# Altium PCB I2C_Shield.PcbDoc
Units mil, origin at the board's own origin, x right, y up, seen from the top; angles counter-clockwise.
Board outline 2102.56 x 2245.28 mil, 2 copper layers (Top Layer, Bottom Layer); 38 components, 43 nets, 144 pads, 21 vias.
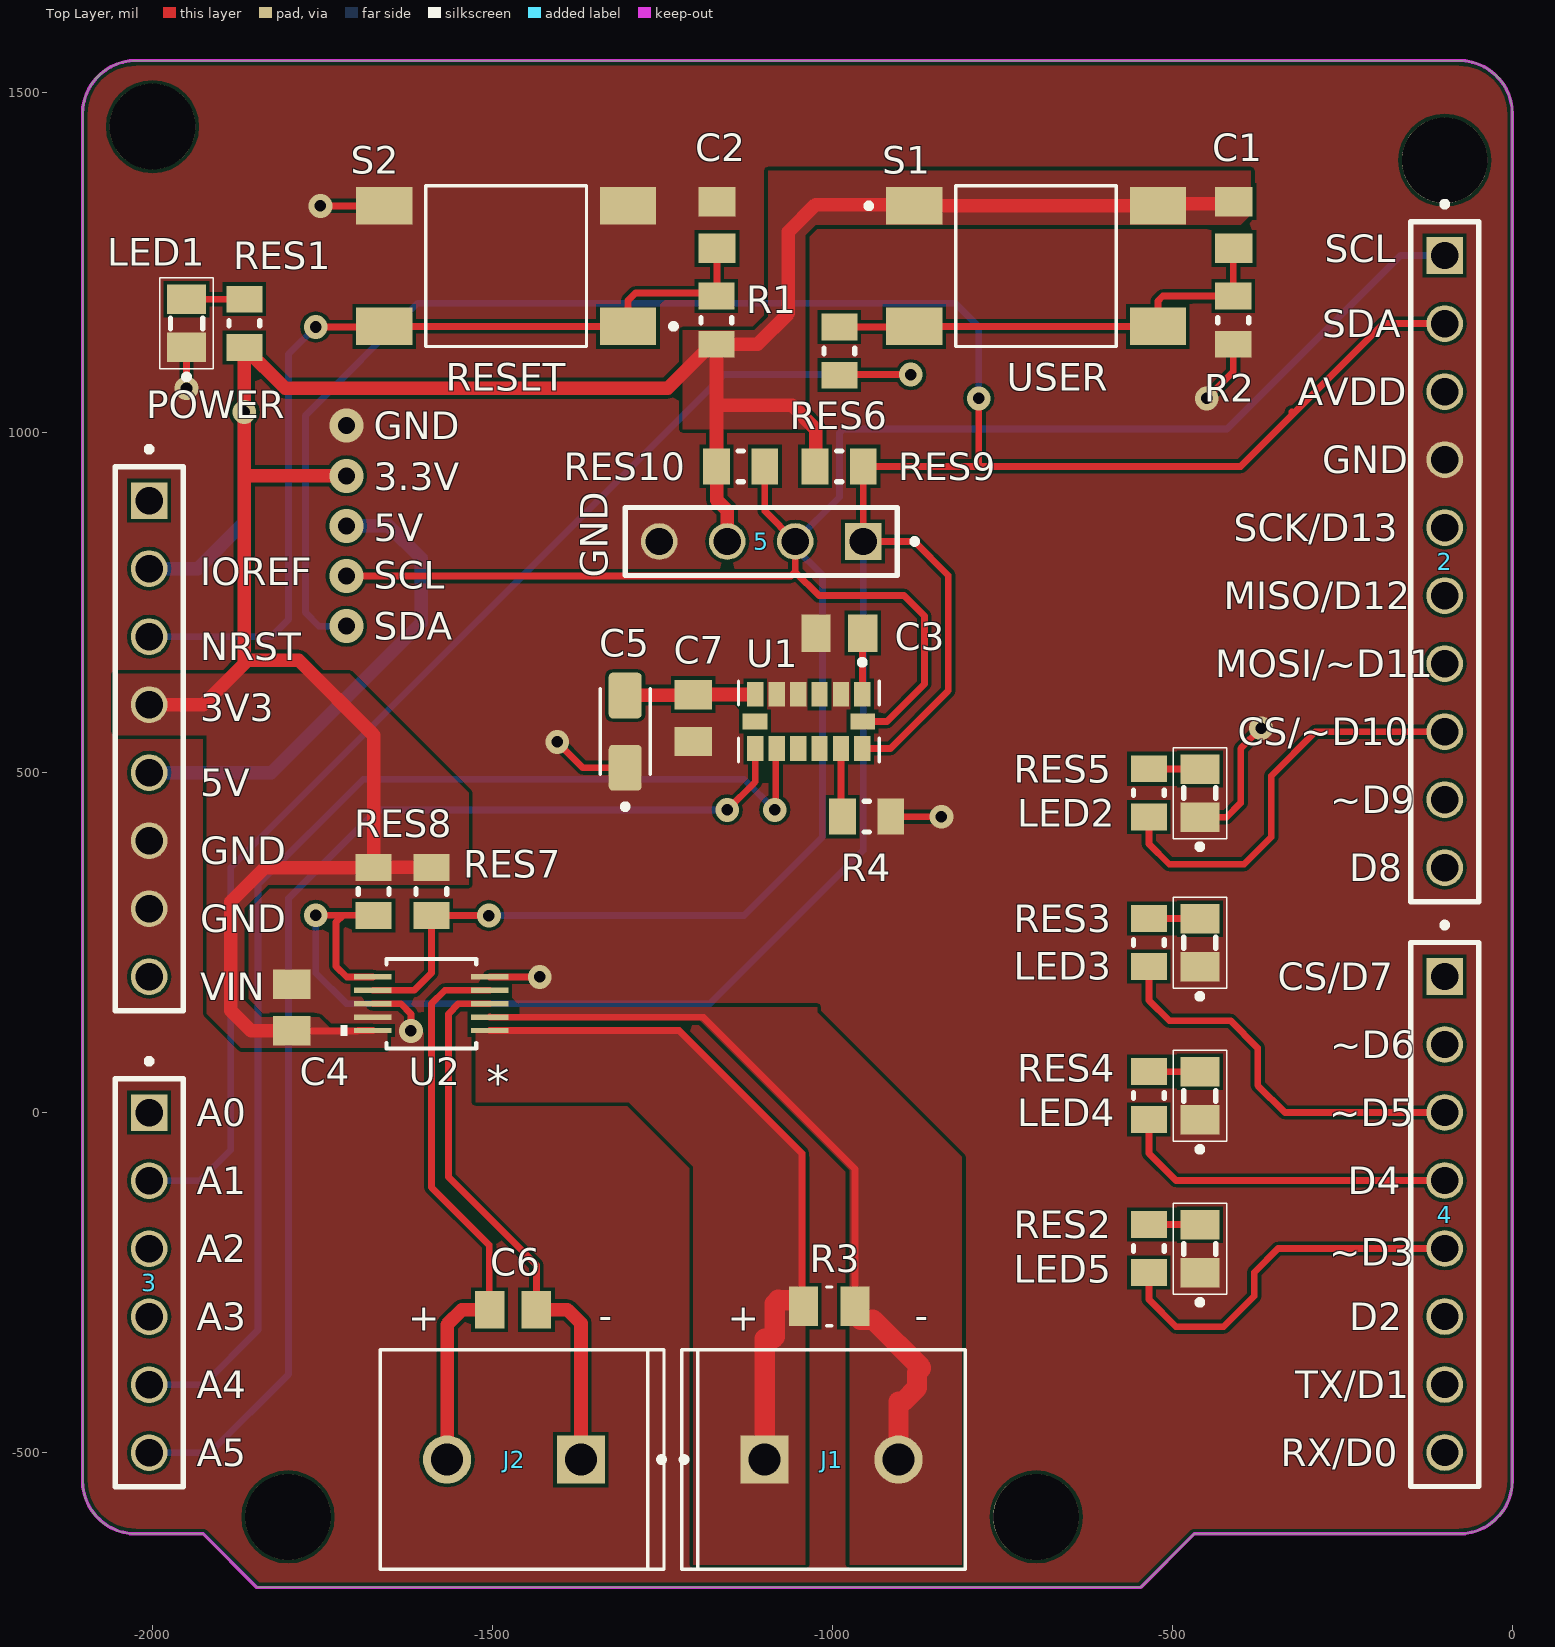
[diagram p0: Top Layer view]
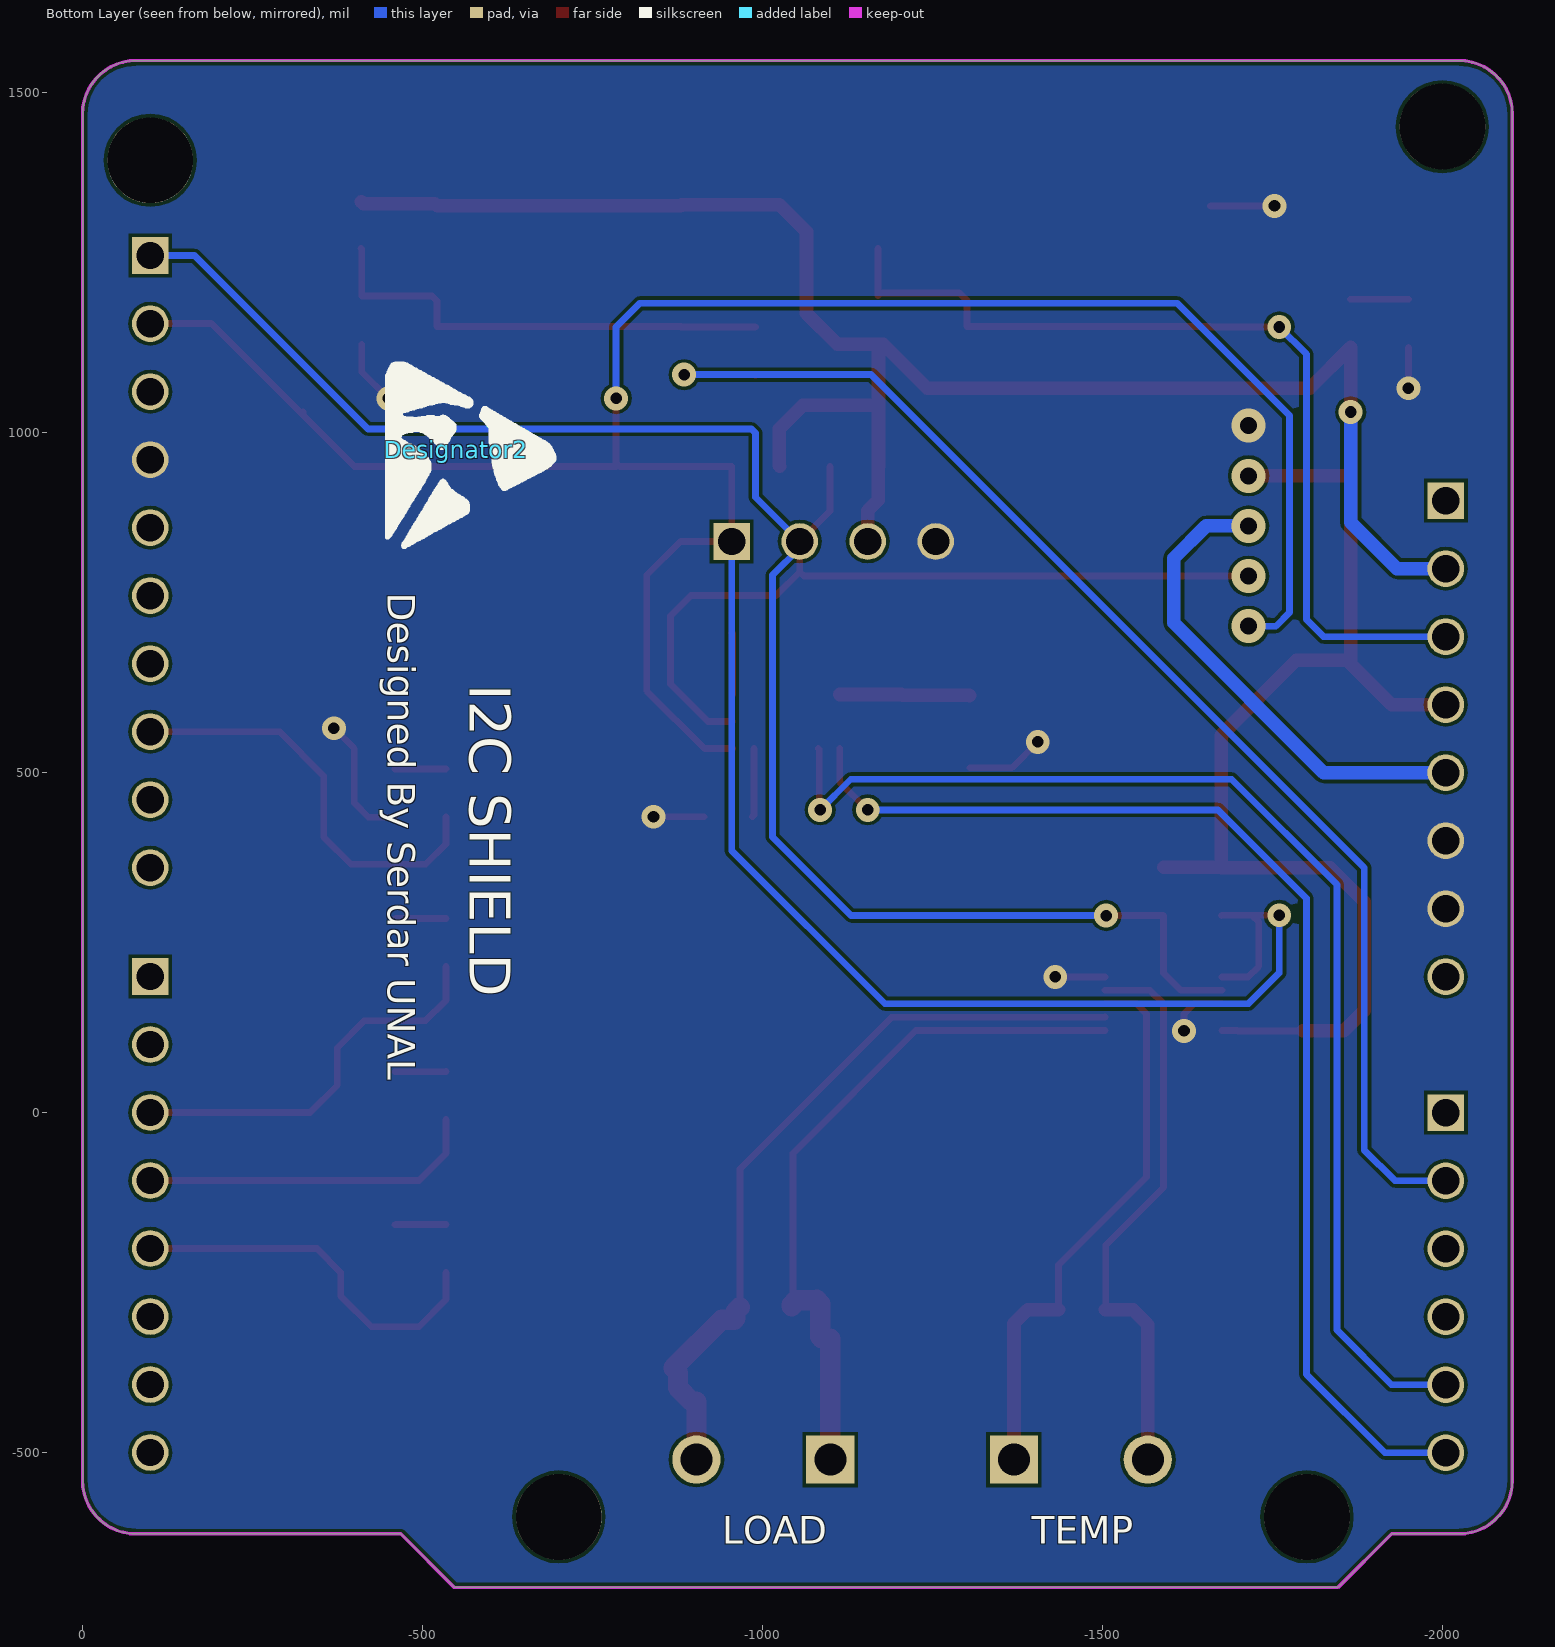
[diagram p1: Bottom Layer view, seen from below]

## Layer stack, top to bottom
Top Solder: solder mask 0.4, Solder Resist, Dk 3.5
Top Layer: signal copper 1.4
Dielectric 1: dielectric 12.6, FR-4, Dk 4.8
Bottom Layer: signal copper 1.4
Bottom Solder: solder mask 0.4, Solder Resist, Dk 3.5

## Board outline
-2102.95,-540.94 ccw(c-2024.21,-540.94) -2024.21,-619.69 -1925.2,-619.69 -1846.46,-698.43 -547.24,-698.43 -468.5,-619.69 -79.13,-619.68 ccw(c-79.13,-540.94) -0.39,-540.94 -0.39,1468.11 ccw(c-79.13,1468.11) -79.13,1546.85 -2024.21,1546.85 ccw(c-2024.21,1468.11) -2102.95,1468.11

## Design rules (kind name [scope] priority, off if disabled: settings)
Clearance [All] p1: gap=5 ignorepadtopadclearanceinfootprint=FALSE
ComponentClearance [All] p1: gap=10 collisioncheckmode=3 verticalgap=-100 showdistances=FALSE
HoleSize [All] p1: absolutevalues=TRUE maxlimit=200 minlimit=5.91 maxpercent=80.000 minpercent=20.000
HoleToHoleClearance [All] p1: gap=20 allowstackedmicrovias=TRUE
MinimumSolderMaskSliver [All] p1: minsoldermaskwidth=3.11
NetAntennae [All] p1: netantennaetolerance=10
PlaneConnect [All] p1: planeconnectstyle=Direct reliefexpansion=20 reliefentries=4 reliefconductorwidth=10 reliefairgap=10
PolygonConnect [All] p1: connectstyle=Direct reliefconductorwidth=10 reliefentries=4 polygonreliefangle="90 Angle" airgapwidth=10
RoutingVias [All] p1: holewidth=17 width=35 viastyle="Through Hole" minholewidth=15 minwidth=30 maxholewidth=25 maxwidth=50
SilkToSilkClearance [All] p1: silktosilkclearance=6
SilkToSolderMaskClearance [IsPad] p1: minsilkscreentomaskgap=1.97 clearancetoexposedcopper=TRUE
SolderMaskExpansion [All] p1: expansion=4 istentingtop=FALSE
SupplyNets "Schematic Supply Nets_4" [InNet('AVDD')] p1: voltage=0.000
SupplyNets "Schematic Supply Nets_3" [InNet('VIN')] p2: voltage=0.000
SupplyNets "Schematic Supply Nets_2" [InNet('+3V3')] p3: voltage=0.000
SupplyNets "Schematic Supply Nets_1" [InNet('GND')] p4: voltage=0.000
SupplyNets "Schematic Supply Nets" [InNet('+5V')] p5: voltage=0.000
Width [All] p1: maxlimit=30 minlimit=10 preferedwidth=20 minimp=50.000000 maximp=50.000000 favimp=50.000000
22 further rules are at their usual default settings.

## Components (designator, comment, footprint, x,y, rotation, side; value= is the part's Value field where it differs from the comment)
1 "8x1_Header_2.54" 8X1_HEADER -1995,529.68 r270 top
2 "10X1_Header_2.54" 10X1_HEADER -105,810 r270 top
3 "6x1_Header_2.54" 6X1_HEADER -2005,-250.32 r90 top locked
4 "8x1_Header_2.54" 8X1_HEADER -90,-170 r270 top locked
5 "4x1_Header_2.54" 4X1_HEADER -1125,819.68 r180 top
C1 "CAP_0805_100nF*" CAP_0805 -410,1305 r270 top
C2 "CAP_0805_100nF*" CAP_0805 -1170,1305 r90 top
C3 "CAP_0805_0.1uF" CAP_0805 -990,705 r0 top
C4 "CAP_0805_0.1uF" CAP_0805 -1795,154.45 r90 top
C5 "T491A106K010AT2478" CAPMP3216X180N -1305,560 r90 top
C6 "CAP_0805_470pF" CAP_0805 -1470,-290 r180 top
C7 "CAP_0805_0.1uF" CAP_0805 -1205,580 r270 top
Designator2 "Comment" "LOGO ESD" -550,975 r270 bottom
J1 "282836-2" TE_282836-2 -1001.57,-510.32 r0 top
J2 "282836-2" TE_282836-2 -1468.43,-510.32 r180 top
LED1 "LED_0805_Red" LED_0805 -1950,1160.87 r90 top (schematic designator Red_LED_2)
LED2 "LED_0805_Orange" LED_0805 -460,470 r90 top (schematic designator Orange_LED1)
LED3 "LED_0805_Blue" LED_0805 -460,250 r90 top (schematic designator Blue_LED_1)
LED4 "LED_0805_Green" LED_0805 -460,25 r90 top (schematic designator Green_LED1)
LED5 "LED_0805_Red" LED_0805 -460,-200 r90 top (schematic designator LED1)
R1 "RES_0805_10K" RES_0805 -1170.98,1165 r270 top
R2 "RES_0805_10K" RES_0805 -410.98,1165 r270 top
R3 "CSRF0805FT10L0" RESC2113X85N -1005,-285 r0 top
R4 "RES_0805_10K" RES_0805 -950,435 r0 top
RES1 "RES_0805_470" RES_0805 -1865,1160.43 r270 top
RES2 "RES_0805_470" RES_0805 -535,-200 r90 top
RES3 "RES_0805_470" RES_0805 -535,250 r90 top
RES4 "RES_0805_470" RES_0805 -535,25 r90 top
RES5 "RES_0805_470" RES_0805 -535,470 r90 top
RES6 "RES_0805_470" RES_0805 -990,1119.57 r270 top
RES7 "RES_0805_4K7" RES_0805 -1590,325 r90 top
RES8 "RES_0805_4K7" RES_0805 -1675,325 r90 top
RES9 "RES_0805_4K7" RES_0805 -990.43,950 r180 top
RES10 "RES_0805_4K7" RES_0805 -1135.13,950 r180 top
S1 "6MM_Button" BUTTON -705.87,1244.49 r0 top
S2 "6MM_Button" BUTTON -1475,1244.49 r180 top
U1 "ADXL345" PQFN80P500X300X100-14N -1035,575 r270 top
U2 "LTC2990IMS#PBF" MSOP-10_MS -1590,160 r180 top

## Footprints (in the part's own frame and the unit in brackets; to place one, negate y for a bottom-side part, rotate by r counter-clockwise, add the part's x,y. Pads: shape width x height; smd on the part's side, far side on the other; paste and mask are expansions set on the pad)
4X1_HEADER [mm]
  rect 1.37x1.37 hole 1.02: 01(-4.318,-0.508)
  round 1.37 hole 1.02: 02(-1.778,-0.508) 03(0.762,-0.508) 04(3.302,-0.508)
  silkscreen extent -6.34,-1.78 4.57,0.76, body extent -5.84,-1.78 4.83,0.76, height 8.51
6X1_HEADER [mm]
  rect 1.37x1.37 / inner round 1.37 / far side rect 1.37x1.37 hole 1.02: 01(6.35,0)
  round 1.37 hole 1.02: 02(3.81,0) 03(1.27,0) 04(-1.27,0) 05(-3.81,0) 06(-6.35,0)
  silkscreen extent -7.62,-1.27 8.37,1.27, body extent -7.87,-1.27 7.87,1.27, height 8.51
8X1_HEADER [mm]
  rect 1.37x1.37 hole 1.02: 01(-9.398,-0.254) 01(-9.398,-0.254)
  round 1.37 hole 1.02: 02(-6.858,-0.254) 02(-6.858,-0.254) 03(-4.318,-0.254) 03(-4.318,-0.254) 04(-1.778,-0.254) 04(-1.778,-0.254) 05(0.762,-0.254) 05(0.762,-0.254) 06(3.302,-0.254) 06(3.302,-0.254) 07(5.842,-0.254) 07(5.842,-0.254) 08(8.382,-0.254) 08(8.382,-0.254)
  silkscreen extent -11.42,-1.52 9.65,1.02, body extent -10.92,-1.52 9.91,1.02, height 8.51
10X1_HEADER [mm]
  rect 1.37x1.37 / inner round 1.37 / far side rect 1.37x1.37 hole 1.02: 01(-11.43,0.127)
  round 1.37 hole 1.02: 02(-8.89,0.127) 03(-6.35,0.127) 04(-3.81,0.127) 05(-1.27,0.127) 06(1.27,0.127) 07(3.81,0.127) 08(6.35,0.127) 09(8.89,0.127) 10(11.43,0.127)
  silkscreen extent -13.45,-1.14 12.7,1.4, body extent -12.95,-1.14 13.08,1.4, height 8.51
BUTTON [mm]
  rect 2.1x1.4 smd: 1(-4.423,2.25) 2(-4.423,-2.25) 3(4.677,2.25) 4(4.677,-2.25)
  silkscreen extent -6.22,-3 3.13,3, body extent -4.87,-3 5.13,3, height 9.5
CAP_0805 [mm]
  rect 1.1x1.4 smd: 1(-0.875,0) 2(0.875,0)
  body extent -1.05,-0.67 1.05,0.67, height 0.85
CAPMP3216X180N [mm]
  rrect25% 1.71x1.23 smd: 1(-1.35,0) 2(1.35,0)
  silkscreen extent -2.9,-0.93 1.6,0.93, body extent -1.6,-0.8 1.6,0.8, height 1.8
LED_0805 [mm]
  rect 1.1x1.45 smd: A(0.889,0) C(-0.911,0)
  silkscreen extent -2.11,-1 1.69,1, body extent -1.01,-0.63 0.99,0.63, height 0.7
"LOGO ESD" [mil]
  silkscreen extent -127,-102 144,145
MSOP-10_MS [mil]
  rect 55x8 smd: 1(-86,39.4) 2(-86,19.7) 3(-86,0) 4(-86,-19.7) 5(-86,-39.4) 6(86,-39.4) 7(86,-19.7) 8(86,0) 9(86,19.7) 10(86,39.4)
  silkscreen extent -66,-66 134,66, body extent -96,-59 96,59, height 43
PQFN80P500X300X100-14N [mm]
  rect 0.92x0.61 smd mask+0.05: 1(-1.01,2) 2(-1.01,1.2) 3(-1.01,0.4) 4(-1.01,-0.4) 5(-1.01,-1.2) 6(-1.01,-2) 8(1.01,-2) 9(1.01,-1.2) 10(1.01,-0.4) 11(1.01,0.4) 12(1.01,1.2) 13(1.01,2)
  rect 0.61x0.92 smd mask+0.05: 7(0,-2.01) 14(0,2.01)
  silkscreen extent -2.31,-2.63 1.5,2.63, body extent -1.5,-2.5 1.5,2.5, height 1
RES_0805 [mm]
  rect 1x1.35 smd: 1(-0.9,0) 2(0.9,0)
  silkscreen extent -0.1,-0.58 0.1,0.58, body extent -1.05,-0.67 1.05,0.67, height 0.5
RESC2113X85N [mm]
  rect 1.09x1.47 smd: 1(-0.965,0) 2(0.965,0)
  silkscreen extent -0.1,-0.72 0.1,0.72, body extent -1.05,-0.65 1.05,0.65, height 0.85
TE_282836-2 [mm]
  rect 1.8x1.8 / inner round 1.8 / far side rect 1.8x1.8 hole 1.2: 1(-2.5,0)
  round 1.8 hole 1.2: 2(2.5,0)
  silkscreen extent -6.45,-4.1 5,4.1, body extent -5.6,-4.1 5,4.1, height 10

## Part data
C1 C2: library part CAP_0805_100nF
C5: "10 ÂµF Molded Tantalum Capacitors 10 V 1206 (3216 Metric) 3.8Ohm", Package="SMD-2 KEMET", Availability="In Stock", Check_prices=https://www.snapeda.com/parts/T491A106K010AT2478/KEMET/view-part/?ref=eda, MF=KEMET, MP=T491A106K010AT2478, Price=None, Purchase-URL=https://pricing.snapeda.com/search/part/T491A106K010AT2478/?ref=eda, SnapEDA_Link=https://www.snapeda.com/parts/T491A106K010AT2478/KEMET/view-part/?ref=snap
J1 J2: "Connector, Terminal Block; Wire Receptacle; 2 Pos.; 16-30 AWG; 0.197 in. CL; Sid", Package=None, Availability="In Stock", Check_prices=https://www.snapeda.com/parts/282836-2/TE+Connectivity+AMP+Connectors/view-part/?ref=eda, MF="TE Connectivity", MP=282836-2, Price=None, Purchase-URL=https://pricing.snapeda.com/search/part/282836-2/?ref=eda, SnapEDA_Link=https://www.snapeda.com/parts/282836-2/TE+Connectivity+AMP+Connectors/view-part/?ref=snap
R1 R2 R4: "0805 10K Ohms 5% 1/8W 100PPM SMT"
R3: "10 mOhms Â±1% 0.5W, 1/2W Chip Resistor 0805 (2012 Metric) Automotive AEC-Q200, Current Sense, Moisture Resistant Metal Foil", Package="0805 Stackpole Electronics", Check_prices=https://www.snapeda.com/parts/CSRF0805FT10L0/Stackpole+Electronics/view-part/?ref=eda, MF="Stackpole Electronics", MP=CSRF0805FT10L0, SnapEDA_Link=https://www.snapeda.com/parts/CSRF0805FT10L0/Stackpole+Electronics/view-part/?ref=snap
U1: "Accelerometer X, Y, Z Axis ±2g, 4g, 8g, 16g 0.05Hz ~ 1.6kHz 14-LGA (3x5)", Package="LGA -14 Analog Devices", Check_prices=https://www.snapeda.com/parts/ADXL345/Analog+Devices/view-part/?ref=eda, MF="Analog Devices, Inc.", MP=ADXL345, SnapEDA_Link=https://www.snapeda.com/parts/ADXL345/Analog+Devices/view-part/?ref=snap
U2: "Quad I2C Voltage, Current and Temperature Monitor", Package="MSOP-10 Analog Devices", Availability="In Stock", Check_prices=https://www.snapeda.com/parts/LTC2990IMS%23PBF/Analog+Devices/view-part/?ref=eda, MF="Analog Devices", MP=LTC2990IMS#PBF, Price=None, Purchase-URL=https://pricing.snapeda.com/search?q=LTC2990IMS#PBF&ref=eda, SnapEDA_Link=https://www.snapeda.com/parts/LTC2990IMS%23PBF/Analog+Devices/view-part/?ref=snap

## Free pads (board coordinates)
  round 125.98 hole 125.98 unplated: 0(-2000,1449.68) 0(-1800.79,-594.68) 0(-700.79,-594.68) 0(-100,1400)

## Via types
v1: diameter 35, hole 17, Top Layer to Bottom Layer, tented both sides, 16 vias
v2: diameter 50, hole 25, Top Layer to Bottom Layer, 5 vias

## Nets (pads, with @x,y where several pads share a name; then routed paths per layer and width w, separated by ;. In a path a pad name is that pad's centre, name@x,y a point inside that pad or via, vN(x,y) a via of type N, cw(c..) or ccw(c..) an arc to the next point about the centre after c; other vN are vias at no path point)
+3V3: 1.02 1.04 5.03 C1.1 C4.1 R1.2 RES1.2 RES7.2 RES8.2 RES9.2 RES10.2 S1.1 S1.3 U2.10 | length 4419.1
  Top Layer w10: C4.1 -1698.6,120 -1698,120.6 U2.10
  Top Layer w20: 1.04@-2005,599.68 -1925.32,599.68 -1865,660 ; C4.1 -1855,120 -1885,150 -1885,310 -1835,360 -1675.43,360 RES8.2 ; v2(-1715,936.25) -1861.25,936.25 -1865,940 ; RES7.2 RES8.2 ; 5.03 -1155,885 -1170.56,900.56 RES10.2 -1170.77,950.21 -1170.77,1039.78 ; RES9.2 -1025,950.87 -1025,1005 -1059.78,1039.78 -1170.77,1039.78 ; C1.1 -413.19,1336.26 -518.55,1336.26 S1.3 S1.1 -881.93,1335 -1025,1335 -1065,1295 -1065,1175 -1110.43,1129.57 R1.2 ; -1865,660 -1860,665 -1785,665 -1675,555 RES8.2 ; -1865,660 -1865,925 -1865,940 ; -1865,940 v1(-1865,1030) RES1.2 -1805,1065 -1242.44,1065 -1177.87,1129.57 R1.2 ; R1.2 -1170.77,1129.35 -1170.77,1039.78
  Bottom Layer w20: 1.02@-2005,799.68 -1933.28,799.68 -1865,867.97 v1(-1865,1030)
+5V: 1.05 | length 715.9
  Bottom Layer w20: 1.05@-2005,499.68 -1825.32,499.68 -1605,720 -1605,815 -1652.5,862.5 v2(-1715,862.5)
AVDD: 2.03
GND: 1.06 1.07 2.04 5.04 C2.2 C3.1 C4.2 C5.1 C7.2 LED1.C LED2.C LED3.C LED4.C LED5.C R2.2 R4.2 S2.2 S2.4 U1.2 U1.4 U1.5 U2.5 U2.8 U2.9 | length 791.7
  Top Layer w10: v1(-1950,1065) LED1.C ; v1(-1753.07,1333.07) S2.4 ; U2.8 -1635,160 -1620,145 v1(-1620,120) ; U2.5 v1(-1430.6,199.4) ; v1(-1405,545) -1366.85,506.85 C5.1 ; R4.2 v1(-840,435) ; LED2.C -420.87,434.13 -400,455 -400,535 v1(-370,565) ; v1(-450,1050) -410.98,1089.02 R2.2
  other v2: -1715,1010
NetBlue_LED_1_A: LED3.A RES3.2 | length 75.2
  Top Layer w10: RES3.2 -460.43,285.43 LED3.A
NetC1_2: C1.2 R2.1 RES6.1 S1.2 S1.4 | length 690.2
  Top Layer w10: RES6.1 -880.91,1155 S1.2 S1.4 -521.73,1193.27 -514.57,1200.43 R2.1 -410.98,1269.57 C1.2
NetC3_2: C3.2 U1.1 | length 90.5
  Top Layer w10: U1.1 -956.26,704.29 C3.2
NetGreen_LED1_A: LED4.A RES4.2 | length 75.2
  Top Layer w10: RES4.2 -534.57,60 LED4.A
NetLED1_A: LED5.A RES2.2 | length 75.2
  Top Layer w10: RES2.2 -460.43,-164.57 LED5.A
NetOrange_LED1_A: LED2.A RES5.2 | length 75.2
  Top Layer w10: RES5.2 -534.57,505 LED2.A
NetR4_1: R4.1 U1.12 | length 101.2
  Top Layer w10: U1.12 -987.76,437.32 R4.1
NetRed_LED_2_A: LED1.A RES1.1 | length 85
  Top Layer w10: LED1.A RES1.1
NRST: 1.03 C2.1 R1.1 S2.1 S2.3 | length 1365.8
  Top Layer w10: v1(-1760,1155) -1660.04,1155 S2.3 S2.1 -1300.87,1194.13 -1290,1205 -1173.58,1205 -1170,1201.42 C2.1
  Bottom Layer w10: 1.03@-2005,699.68 -1825.32,699.68 -1800,725 -1800,1115 v1(-1760,1155)
PA0: 3.01
PA1: 3.02 RES6.2 | length 1959.4
  Top Layer w10: RES6.2 -989.13,1085 v1(-885,1085)
  Bottom Layer w10: 3.02 -1930.32,-100.32 -1885,-55 -1885,360 -1160,1085 v1(-885,1085)
PA2/TX: 4.07
PA3/RX: 4.08
PA4: 3.03
PA5/SCK: 2.05
PA6/MISO: 2.06
PA7/MOSI: 2.07
PA8/CS: 4.01
PA9: 2.10
PA10: 4.06
PB0: 3.04
PB3: 4.05 RES2.1 | length 559.3
  Top Layer w10: RES2.1 -535,-275 -495,-315 -425,-315 -380,-270 -380,-235 -345,-200 4.05@-100,-200
PB4: 4.03 RES3.1 | length 585.1
  Top Layer w10: RES3.1 -535,165 -505,135 -415,135 -375,95 -375,40 -335,0 4.03@-100,0
PB5: 4.04 RES4.1 | length 501.1
  Top Layer w10: RES4.1 -535,-60 -495,-100 4.04@-100,-100
PB6: 2.08 RES5.1 | length 620.5
  Top Layer w10: RES5.1 -535,395 -505,365 -395,365 -355,405 -355,495 -290,560 2.08
"PB8 / SCL": 
PB8/SCL: 2.01 5.02 RES7.1 RES10.1 U1.14 U2.7 | length 3706.2
  Top Layer w10: v2(-1715,788.75) -1061.25,788.75 -1055,795 ; U2.7 -1615.3,179.7 -1590,205 RES7.1 v1(-1505.43,289.57) ; RES10.1 -1099.69,884.38 5.02 -1055,795 ; U1.14 -920,575 -865,630 -865,730 -895,760 -1020,760 -1055,795
  Bottom Layer w10: v1(-1505.43,289.57) -1130.43,289.57 -1015,405 -1015,790.33 -1055,830.33 5.02 -990,904.68 -990,999.14 -984.14,1005 -420,1005 -165,1260 2.01
"PB9 / SDA": 
PB9/SDA: 2.02 5.01 RES8.1 RES9.1 U1.13 U2.6 | length 4847.3
  Top Layer w10: v1(-1760,290) -1720,290 ; U2.6 -1714.4,199.4 -1730,215 -1730,280 -1720,290 ; RES8.1 -1675.43,290 -1720,290 ; U1.13 -914.76,535.24 -830,620 -830,790 -879.68,839.68 5.01 RES9.1 -790,950 -785,955 v1(-785,1050) ; -785,950 -400,950 -322.5,1027.5 ; -325,1030 -322.5,1027.5 ; 2.02 -190,1160 -322.5,1027.5
  Bottom Layer w10: v1(-1760,290) -1760,205 -1715,160 -1180,160 -955,385 5.01 ; v2(-1715,715) -1755,715 -1775,735 -1775,1025 -1610,1190 -820,1190 -785,1155 v1(-785,1050)
PB10: 4.02
PC0: 3.06 U1.8 | length 1758.9
  Top Layer w10: v1(-1155,445) -1113.74,486.26 U1.8
  Bottom Layer w10: 3.06 -1915.32,-500.32 -1800,-385 -1800,315 -1670,445 v1(-1155,445)
PC1: 3.05 U1.9 | length 1782.5
  Top Layer w10: v1(-1085,445) -1083.62,446.38 -1083.62,533.86 U1.9
  Bottom Layer w10: 3.05 -1925.32,-400.32 -1845,-320 -1845,335 -1690,490 -1130,490 v1(-1085,445)
PC7: 2.09
V1: J1.1 R3.1 U2.1 | length 1041.6
  Top Layer w10: U2.1 -1225.6,120.6 -1045,-60 -1045,-282.99 R3.1
  Top Layer w30: J1.1 -1100,-435 -1100,-390 -1100,-332.3 ; -1088.37,-332.3 -1087.41,-332.3 -1085.1,-329.99 -1085.1,-281.45 -1080,-276.35 -1080,-275 -1079.04,-275.96 -1049.45,-275.96 -1042.99,-282.41 R3.1
V2: J1.2 R3.2 U2.2 | length 1118.1
  Top Layer w10: U2.2 -1503.7,140 -1190,140 -967.01,-82.99 R3.2
  Top Layer w30: R3.2@-967.01,-286.29 -960.55,-292.75 -960.55,-302.48 -958.58,-304.45 -940.55,-304.45 -870,-375 -870,-376.35 -875.96,-382.31 -875.96,-404.6 -896.35,-425 -897.31,-425 ; J1.2 -903.15,-425
V3: C6.1 J2.1 U2.3 | length 830
  Top Layer w10: U2.3 -1550,160 -1565,145 -1565,-95 -1435.55,-224.45 C6.1
  Top Layer w20: C6.1 -1390,-290 -1370,-310 J2.1
V4: C6.2 J2.2 U2.4 | length 849.5
  Top Layer w10: C6.2 -1505,-289.45 -1505,-195 -1590,-110 -1590,160 -1570.3,179.7 U2.4
  Top Layer w20: J2.2 -1566.85,-311.85 -1545,-290 C6.2
VIN: 1.08
VS: C5.2 C7.1 U1.6 | length 191.9
  Top Layer w20: C5.2 -1304.35,613.8 -1205.65,613.8 C7.1 -1204.84,614.61 -1113.9,614.61 U1.6
pads on no net: 1.01 U1.3 U1.7 U1.10 U1.11

## Polygon pours and split planes (outlines as drawn)
GND on Top Layer "top_gnd" (solid, remove dead copper, pour order 12): -2102.95,-540.94 ccw(c-2024.21,-540.94) -2024.21,-619.69 -1925.2,-619.69 -1846.46,-698.43 -547.24,-698.43 -468.5,-619.69 -79.13,-619.68 ccw(c-79.13,-540.94) -0.39,-540.94 -0.39,1468.11 ccw(c-79.13,1468.11) -79.13,1546.85 -2024.21,1546.85 ccw(c-2024.21,1468.11) -2102.95,1468.11
+3V3 on Top Layer "+3V3_L01_P006" (solid, pour order 6): -1655,120.6 -1655,95 -1870,95 -1920,145 -1920,555 -2060,555 -2055,560 -2055,645 -1710,645 -1535,470 -1535,335 -1830,335 -1865,300 -1865,165 -1840,140 -1755,140 -1735.6,120.6
+3V3 on Top Layer "+3V3_L01_P000" (solid, pour order 0): -385,1320 -400,1305 -1025,1305 -1040,1290 -1040,1005 -1220,1005 -1220,1150 -1115,1150 -1095,1170 -1095,1385 -385,1385
V2 on Top Layer "V2_L01_P011" (solid, pour order 11): -1525,140 -1195,135 -975,-85 -975,-665 -810,-665 -810,-65 -1022.5,147.5
V1 on Top Layer "V1_L01_P007" (solid, pour order 7): -1525,120 -1226.2,120 -1225.6,120.6 -1040,-65 -1040,-665 -1205,-665 -1205,-80 -1300,15 -1525,15
V2 on Top Layer "V2_L01_P008" (solid, pour order 8): -1022.5,155 -1022.5,140 -1460,140 -1460,155 -1460,145 -1460,155
GND on Bottom Layer "bottom_gnd" (solid, remove dead copper, pour order 1): -2102.95,-540.94 ccw(c-2024.21,-540.94) -2024.21,-619.69 -1925.2,-619.69 -1846.46,-698.43 -547.24,-698.43 -468.5,-619.69 -79.13,-619.68 ccw(c-79.13,-540.94) -0.39,-540.94 -0.39,1468.11 ccw(c-79.13,1468.11) -79.13,1546.85 -2024.21,1546.85 ccw(c-2024.21,1468.11) -2102.95,1468.11

## Keep-outs
Keep-Out Layer:
  lines w5: -468.5,-619.68 -79.13,-619.68 ccw(c-79.13,-540.94) -0.39,-540.94 -0.39,1468.11 ccw(c-79.13,1468.11) -79.13,1546.85 -2024.21,1546.85 ccw(c-2024.21,1468.11) -2102.95,1468.11 -2102.95,-540.94 ccw(c-2024.21,-540.94) -2024.21,-619.69 -1925.2,-619.69 -1846.46,-698.43 -547.24,-698.43 -468.5,-619.69 ; -468.5,-619.69 -468.5,-619.68

## Silkscreen, mask and mechanical layers (free items; w line width, h text height)
Top Overlay:
  text "SCL" at -276.57,1250 h40
  text "SDA" at -280,1140 h40
  text "RESET" at -1569,1061 h40
  text "USER" at -744,1061 h40
  text "AVDD" at -315.99,1040 h40
  text "POWER" at -2009,1021 h40
  text "GND" at -1675,990 h40
  text "GND" at -280.38,940 h40
  text "3.3V" at -1675,915 h40
  text "5V" at -1675,840 h40
  text "SCK/D13" at -410.26,840 h40
  text "GND" at -1331,786 h40 r90
  text "IOREF" at -1930,775 h40
  text "SCL" at -1675,770 h40
  text "MISO/D12" at -424.92,740 h40
  text "SDA" at -1675,695 h40
  text "NRST" at -1930,665 h40
  text "MOSI/~D11" at -437.11,640 h40
  text "3V3" at -1930,575 h40
  text "CS/~D10" at -403.97,540 h40
  text "5V" at -1930,465 h40
  text "~D9" at -268,440 h40
  text "GND" at -1930,365 h40
  text "D8" at -240.58,340 h40
  text "GND" at -1930,265 h40
  text "CS/D7" at -345.32,180 h40
  text "VIN" at -1930,165 h40
  text "~D6" at -268,80 h40
  text "A0" at -1935,-20 h40
  text "~D5" at -269.91,-20 h40
  text "A1" at -1935,-120 h40
  text "D4" at -242.48,-120 h40
  text "A2" at -1935,-220 h40
  text "~D3" at -269.91,-225 h40
  text "-" at -1344,-318.99 h40
  text "-" at -879,-318.99 h40
  text "A3" at -1935,-320 h40
  text "D2" at -240.58,-320 h40
  text "+" at -1624,-320.66 h40
  text "+" at -1154,-320.66 h40
  text "A4" at -1935,-420 h40
  text "TX/D1" at -319.8,-420 h40
  text "A5" at -1935,-520 h40
  text "RX/D0" at -341.13,-520 h40
Bottom Overlay:
  text "Designed By Serdar UNAL" at -449.33,764 h40 r90
  text "I2C SHIELD" at -570,630 h60 r90
  text "TEMP" at -1396,-634 h40
  text "LOAD" at -941,-634 h40
Mechanical 1:
  the board outline again, w5

## Text inside footprints (layer, text, board x,y; h text height)
U2: Top Overlay "*" at -1475,90 h50 r180; Mechanical 13 "*" at -1521,152 h50 r180